# Altium PCB WiFi_board.PcbDoc
Units mm, origin at the board's own origin, x right, y up, seen from the top; angles counter-clockwise.
Board outline 43.69 x 34.29 mm, 2 copper layers (Top Layer, Bottom Layer); 13 components, 21 nets, 107 pads, 13 vias.
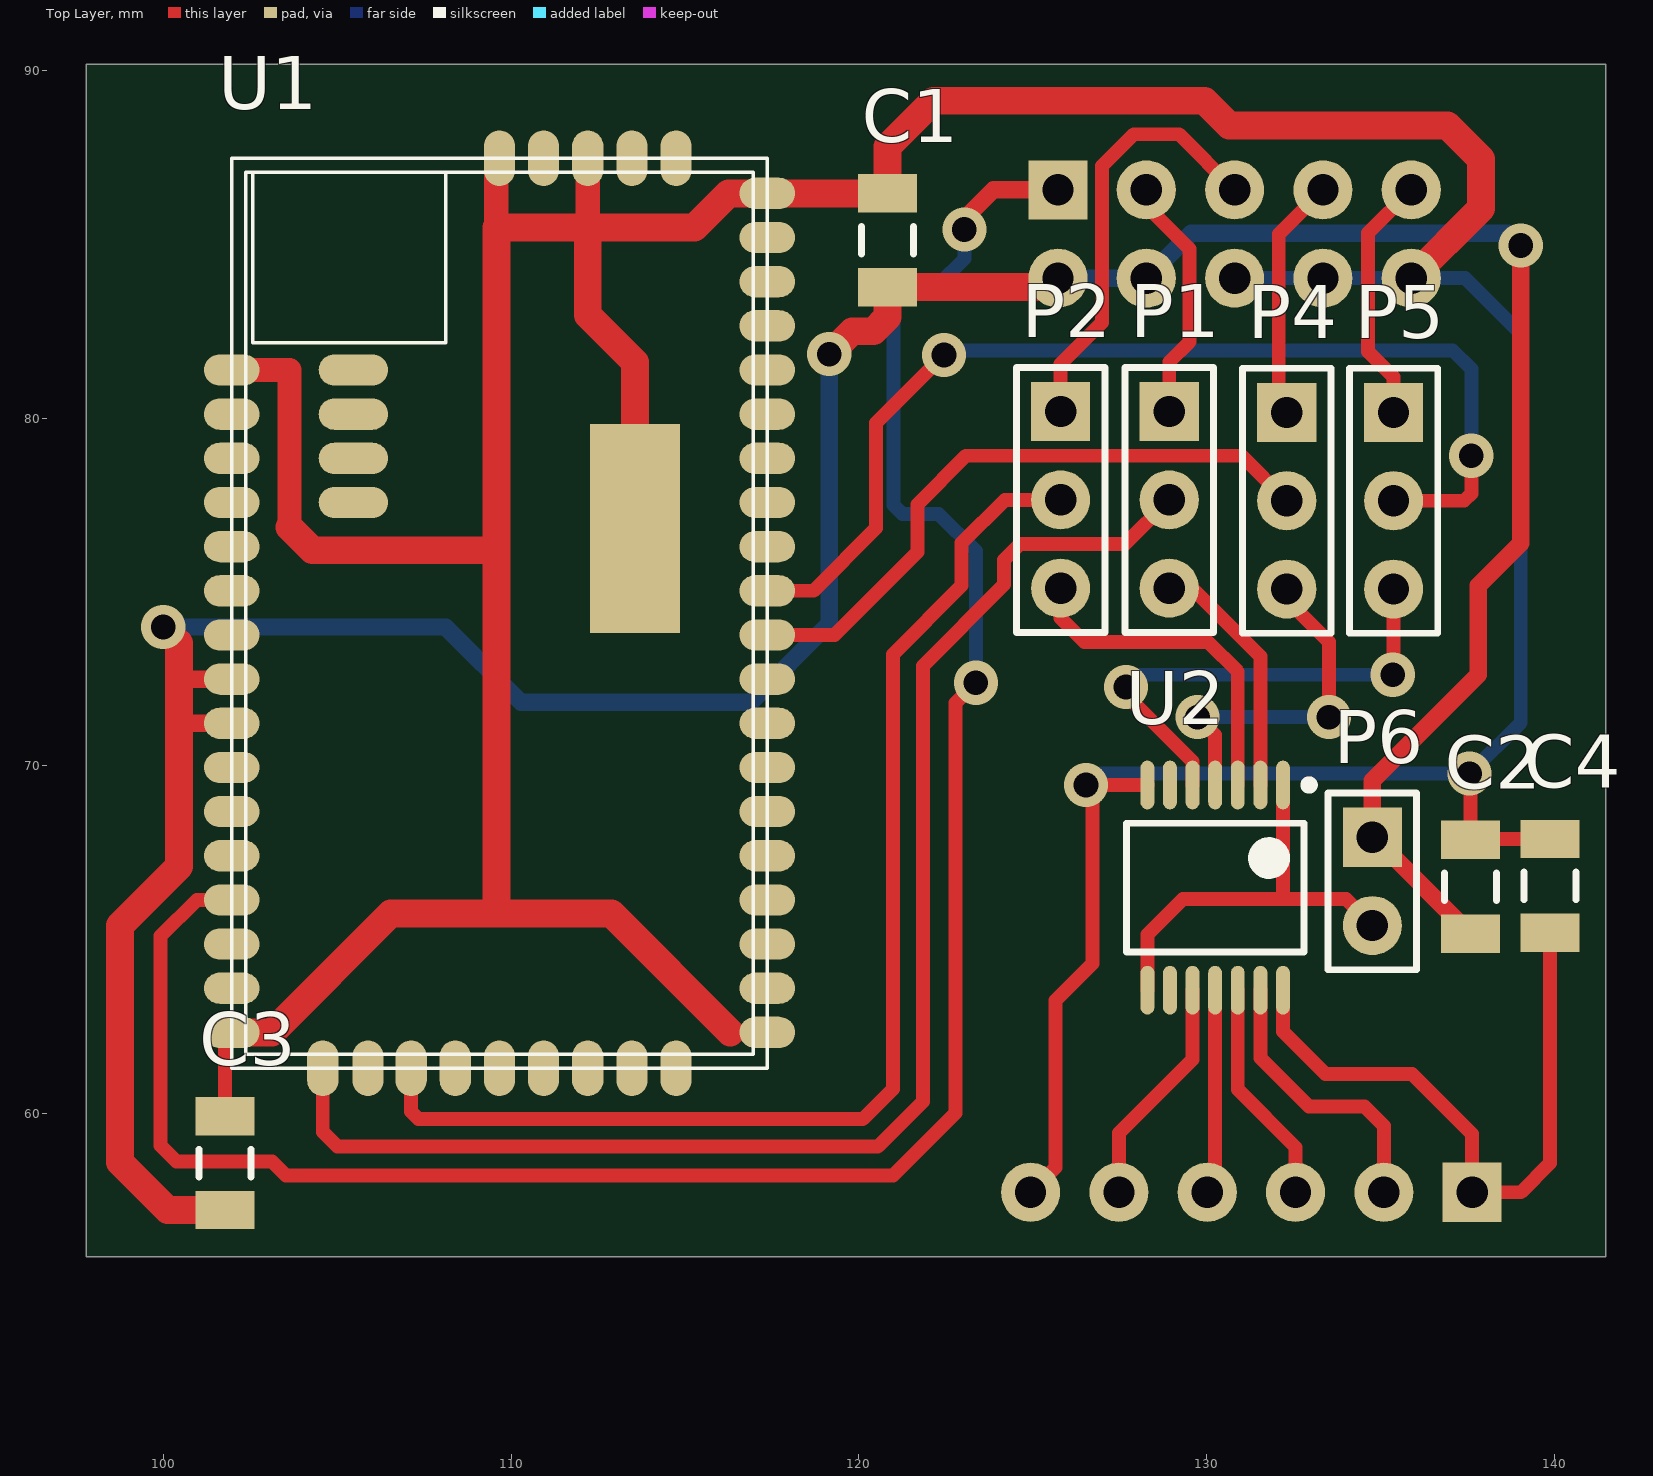
[diagram p0: Top Layer view]
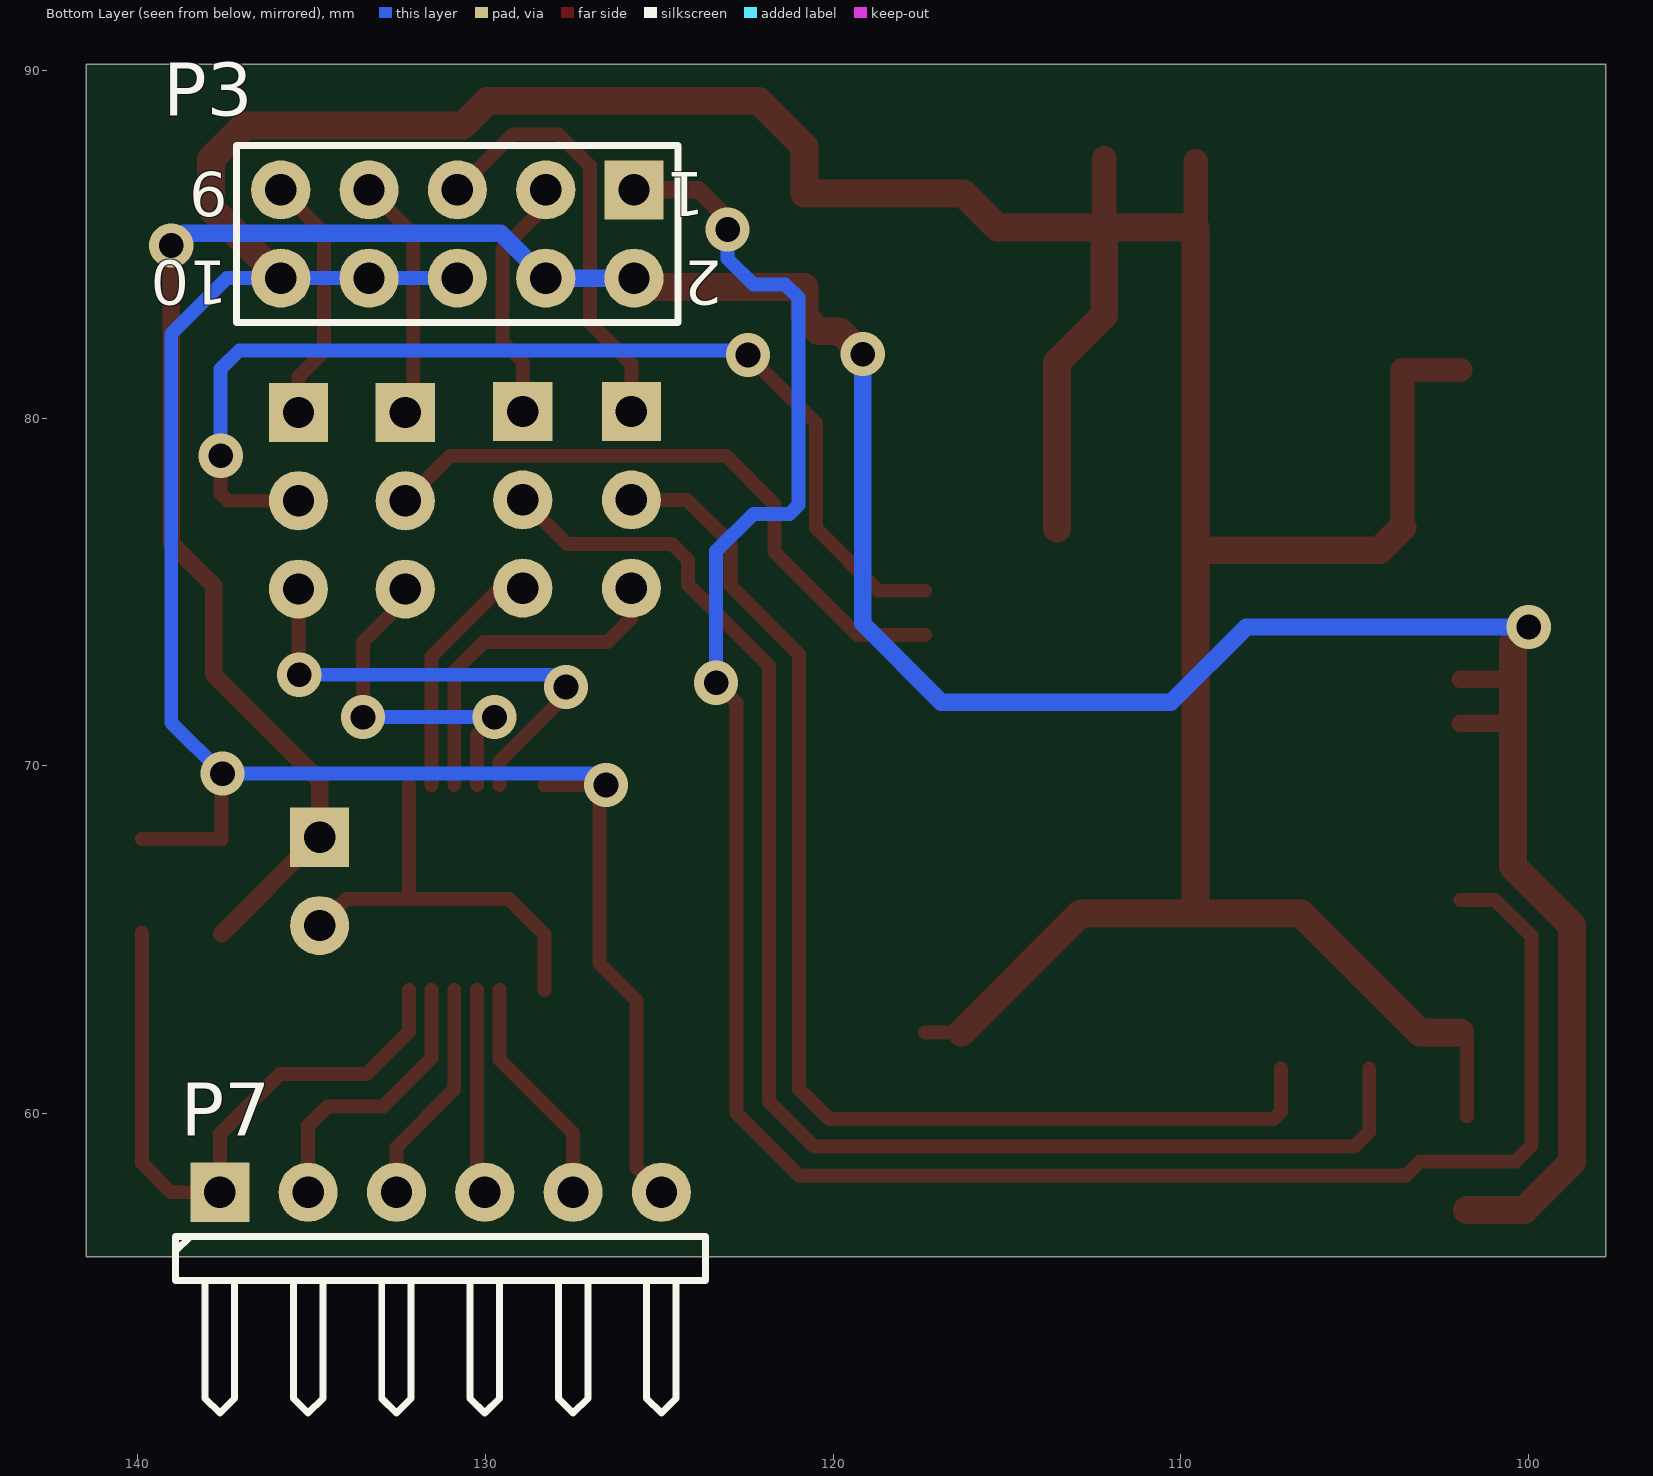
[diagram p1: Bottom Layer view, seen from below]

## Layer stack, top to bottom
Top Solder: solder mask 0.0102, Solder Resist, Dk 3.5
Top Layer: signal copper 0.0356
Dielectric 1: dielectric 0.32, FR-4, Dk 4.8
Bottom Layer: signal copper 0.0356
Bottom Solder: solder mask 0.0102, Solder Resist, Dk 3.5

## Board outline
97.79,55.88 97.79,90.17 141.478,90.17 141.478,55.88

## Design rules (kind name [scope] priority, off if disabled: settings)
Clearance [All] p1: gap=0
PolygonConnect [All] p1: connectstyle=Relief reliefconductorwidth=0.254 reliefentries=4 polygonreliefangle="90 Angle" airgapwidth=0.254
RoutingVias [All] p1: holewidth=0.711 width=1.27 viastyle="Through Hole" minholewidth=0.711 minwidth=1.27 maxholewidth=0.711 maxwidth=1.27
SolderMaskExpansion [All] p1: expansion=0.102
Width [All] p1: maxlimit=10 minlimit=0.254 preferedwidth=0.254
30 further rules are at their usual default settings.

## Components (designator, comment, footprint, x,y, rotation, side; value= is the part's Value field where it differs from the comment)
C1 "C1" C1206 120.828,85.115 r270 top
C2 "C2" C1206 137.592,66.523 r270 top
C3 "Cap Semi" C1206 101.778,58.572 r270 top
C4 "Cap Semi" C1206 139.878,66.548 r270 top
P1 "Header 3" HDR1X3 128.93,80.188 r270 top
P2 "Header 3" HDR1X3 125.806,80.188 r270 top
P3 "Header 5X2" HDR2X5 125.73,86.563 r0 bottom
P4 "Header 3" HDR1X3 132.309,80.162 r270 top
P5 "Header 3" HDR1X3 135.382,80.162 r270 top
P6 "Header 2" HDR1X2 134.772,67.945 r270 top
P7 "Header 6H" HDR1X6H 137.643,57.734 r180 bottom
U1 "WF121" WF121 109.855,74.549 r0 top
U2 "TXB0104" TSSOP65P640X120-14N 130.251,66.497 r270 top

## Footprints (in the part's own frame and the unit in brackets; to place one, negate y for a bottom-side part, rotate by r counter-clockwise, add the part's x,y. Pads: shape width x height; smd on the part's side, far side on the other; paste and mask are expansions set on the pad)
C1206 [mm] "Chip Capacitor, Body 3.2x1.6mm, IPC High Density"
  rect 1.1x1.7 smd: 1(-1.35,0) 2(1.35,0)
  silkscreen extent -0.4,-0.75 0.4,0.75, body extent -1.7,-0.9 1.7,0.9, height 1.3
HDR1X2 [mm] "Connector; Header; 2 Position"
  rect 1.7x1.7 hole 0.9: 1(0,0)
  round 1.7 hole 0.9: 2(2.54,0)
  silkscreen extent -1.27,-1.27 3.81,1.27
HDR1X3 [mm] "Connector; Header; 3 Position"
  rect 1.7x1.7 hole 0.9: 1(0,0)
  round 1.7 hole 0.9: 2(2.54,0) 3(5.08,0)
  silkscreen extent -1.27,-1.27 6.35,1.27
HDR1X6H [mm] "Connector; Header; 6 Position; Right Angle"
  rect 1.7x1.7 hole 0.9: 1(0,0)
  round 1.7 hole 0.9: 2(2.54,0) 3(5.08,0) 4(7.62,0) 5(10.16,0) 6(12.7,0)
  silkscreen extent -1.27,-6.35 13.97,-1.27
HDR2X5 [mm] "Connector; Header; 5x2 Position"
  rect 1.7x1.7 hole 0.9: 1(0,0)
  round 1.7 hole 0.9: 2(0,2.54) 3(2.54,0) 4(2.54,2.54) 5(5.08,0) 6(5.08,2.54) 7(7.62,0) 8(7.62,2.54) 9(10.16,0) 10(10.16,2.54)
  silkscreen extent -1.27,-1.27 11.43,3.81
TSSOP65P640X120-14N [mm] "TSSOP, 14-Leads, Body 5.00x4.40mm, Pitch 0.65mm, IPC Medium Density"
  oval 1.4x0.4 smd: 1(-2.95,1.95) 2(-2.95,1.3) 3(-2.95,0.65) 4(-2.95,0) 5(-2.95,-0.65) 6(-2.95,-1.3) 7(-2.95,-1.95) 8(2.95,-1.95) 9(2.95,-1.3) 10(2.95,-0.65) 11(2.95,0) 12(2.95,0.65) 13(2.95,1.3) 14(2.95,1.95)
  silkscreen extent -3.07,-2.55 1.85,2.83, body extent -2.25,-2.55 2.25,2.55, height 1.2
WF121 [mm]
  oval 1.6x0.9 smd mask+0.05: 1(-7.888,6.834) 2(-7.888,5.564) 3(-7.888,4.294) 4(-7.888,3.024) 5(-7.888,1.754) 6(-7.888,0.484) 7(-7.888,-0.786) 8(-7.888,-2.056) 9(-7.888,-3.326) 10(-7.888,-4.596) 11(-7.888,-5.866) 12(-7.888,-7.136) 13(-7.888,-8.406) 14(-7.888,-9.676) 15(-7.888,-10.946) 16(-7.888,-12.216) 26(7.512,-12.216) 27(7.512,-10.946) 28(7.512,-9.676) 29(7.512,-8.406) 30(7.512,-7.136) 31(7.512,-5.866) 32(7.512,-4.596) 33(7.512,-3.326) 34(7.512,-2.056) 35(7.512,-0.786) 36(7.512,0.484) 37(7.512,1.754) 38(7.512,3.024) 39(7.512,4.294) 40(7.512,5.564) 41(7.512,6.834) 42(7.512,8.104) 43(7.512,9.374) 44(7.512,10.644) 45(7.512,11.914)
  oval 0.9x1.6 smd mask+0.05: 17(-5.268,-13.251) 18(-3.968,-13.251) 19(-2.728,-13.251) 20(-1.458,-13.251) 21(-0.188,-13.251) 22(1.082,-13.251) 23(2.352,-13.251) 24(3.622,-13.251) 25(4.892,-13.251) 46(4.892,12.924) 47(3.622,12.924) 48(2.352,12.924) 49(1.082,12.924) 50(-0.188,12.924)
  rect 2.6x6 smd mask+0.05: 51(3.712,2.274)
  oval 2x0.9 smd mask+0.05: 52(-4.388,6.834) 53(-4.388,5.564) 54(-4.388,4.294) 55(-4.388,3.024)
  silkscreen extent -7.89,-13.25 7.51,12.92

## Part data
C1 C2: library part "Cap Semi", "Capacitor (Semiconductor SIM Model)"
C3 C4: "Capacitor (Semiconductor SIM Model)"
P1 P2 P4 P5: "Header, 3-Pin"
P3: "Header, 5-Pin, Dual row"
P6: "Header, 2-Pin"
P7: "Header, 6-Pin, Right Angle"

## Via types
v1: diameter 1.27, hole 0.711, Top Layer to Bottom Layer, 13 vias

## Nets (pads, with @x,y where several pads share a name; then routed paths per layer and width w, separated by ;. In a path a pad name is that pad's centre, name@x,y a point inside that pad or via, vN(x,y) a via of type N, cw(c..) or ccw(c..) an arc to the next point about the centre after c; other vN are vias at no path point)
3.3V: C1.2 C2.2 C3.2 P3.2 P3.4 P6.1 U1.8 U1.9 | length 96.3
  Top Layer w0.5: v1(100,73.99) 100.456,73.534 ; 100.456,71.274 100.506,71.223 U1.9 ; 100.456,72.493 U1.8 ; P3.2@125.472,83.765 P3.2 ; C2.2 134.819,67.945 P6.1 134.772,69.571 137.82,72.619 137.82,75.184 139.04,76.403 v1@139.04,84.887
  Top Layer w0.8: 100.456,73.534 100.456,72.493 100.456,71.274 100.456,67.105 98.755,65.405 98.755,58.598 100.131,57.222 C3.2 ; v1(119.151,81.839) 119.812,82.499 120.421,82.499 120.828,82.906 C1.2 P3.2@125.472,83.765
  Bottom Layer w0.5: v1(100,73.99) 108.128,73.99 110.287,71.831 116.891,71.831 119.151,74.092 v1(119.151,81.839) v1@119.177,81.864 ; P3.2 P3.4 129.565,85.319 138.684,85.319 v1(139.04,84.963)
5V: C4.2 P7.1 U2.14 | length 18.7
  Top Layer w0.4: U2.14 132.201,62.363 133.426,61.138 135.915,61.138 137.643,59.411 P7.1 139.04,57.734 139.878,58.572 C4.2
CTS: P1.2 U1.17 | length 41.8
  Top Layer w0.4: U1.17 104.587,59.472 105.004,59.055 120.548,59.055 121.844,60.35 121.844,72.873 124.181,75.209 124.181,75.921 124.638,76.378 127.66,76.378 P1.2
GND: C1.1 C2.1 C3.1 C4.1 P3.6 P3.8 P3.10 P7.6 U1.1 U1.16 U1.26 U1.45 U1.48 U1.50 U1.51 U2.7 | length 153
  Top Layer w0.4: C3.1 U1.16@101.778,62.144 ; 109.576,85.471 109.586,85.481 ; U1.50@109.576,87.382 U1.50 ; 116.305,62.333 U1.26 ; P7.6 125.654,58.445 125.654,63.246 126.721,64.313 126.721,69.447 U2.7 ; v1(137.566,69.774) 137.592,69.748 C2.1 137.617,67.898 C4.1
  Top Layer w0.7: U1.1 103.631,81.383 103.631,76.862 ; 109.576,85.471 U1.50@109.576,87.382 ; 112.207,85.481 U1.48
  Top Layer w0.8: U1.16 103.125,62.333 106.543,65.75 109.586,65.75 ; 103.631,76.862 104.292,76.2 109.586,76.2 ; U1.51 113.567,81.607 112.207,82.967 112.207,85.481 ; 116.305,62.333 112.888,65.75 109.586,65.75 ; P3.10 137.897,86.03 137.897,87.452 136.931,88.417 130.658,88.417 129.946,89.129 122.149,89.129 120.825,87.805 120.825,86.463 U1.45 116.257,86.463 115.275,85.481 112.207,85.481 ; 109.586,65.75 109.586,76.2 ; 109.586,76.2 109.586,85.481 112.207,85.481
  Bottom Layer w0.4: v1(126.539,69.447) 126.866,69.774 v1(137.566,69.774) 139.04,71.247 139.04,82.423 137.439,84.023 P3.10 P3.8 P3.6
NetP1_1: P1.1 P3.3 | length 7.1
  Top Layer w0.4: P3.3 128.27,86.106 129.515,84.861 129.515,82.194 128.93,81.61 P1.1
NetP1_3: P1.3 U2.2 | length 7.1
  Top Layer w0.4: P1.3 129.591,75.108 131.551,73.147 U2.2
NetP2_1: P2.1 P3.5 | length 12.4
  Top Layer w0.4: P2.1 125.806,81.559 127,82.753 127,87.249 127.914,88.163 129.21,88.163 P3.5
NetP2_3: P2.3 U2.3 | length 9.9
  Top Layer w0.4: P2.3 125.806,74.244 126.492,73.558 130.048,73.558 130.901,72.705 U2.3
NetP3_7: P3.7 P4.1 | length 7
  Top Layer w0.4: P4.1 132.08,80.391 132.08,85.293 P3.7
NetP3_9: P3.9 P5.1 | length 7.2
  Top Layer w0.4: P5.1 135.382,81.178 134.645,81.915 134.645,85.319 P3.9
NetP4_3: P4.3 U2.4 | length 10.1
  Top Layer w0.4: v1(129.743,71.399) 130.251,70.891 U2.4 ; P4.3 132.309,74.778 133.528,73.558 v1(133.528,71.399)
  Bottom Layer w0.4: v1(129.743,71.399) v1(133.528,71.399)
NetP5_3: P5.3 U2.5 | length 13.9
  Top Layer w0.4: v1(127.686,72.263) 127.686,72.034 129.601,70.119 U2.5 ; v1@135.382,72.619 P5.3
  Bottom Layer w0.4: v1(127.686,72.263) 128.041,72.619 v1(135.357,72.619)
NetP6_2: P6.2 U2.1 U2.8 | length 12.1
  Top Layer w0.4: U2.8 128.301,65.145 129.323,66.167 134.01,66.167 P6.2 ; 132.201,66.187 U2.1
NetP7_2: P7.2 U2.13 | length 8.2
  Top Layer w0.4: U2.13 131.551,61.59 132.944,60.198 134.544,60.198 135.103,59.639 P7.2
NetP7_3: P7.3 U2.12 | length 6.5
  Top Layer w0.4: U2.12 130.901,60.691 132.563,59.03 P7.3
NetP7_4: P7.4 U2.11 | length 5.9
  Top Layer w0.4: P7.4 130.251,57.963 U2.11
NetP7_5: P7.5 U2.10 | length 6.7
  Top Layer w0.4: P7.5 127.483,59.436 129.601,61.555 U2.10
RESET: P3.1 U1.13 | length 64.4
  Top Layer w0.4: U1.13 100.966,66.143 99.924,65.1 99.924,59.08 100.381,58.623 103.124,58.623 103.53,58.217 120.98,58.217 122.784,60.02 122.784,71.806 v1(123.368,72.39)
  Top Layer w0.5: v1(123.038,85.42) 123.038,85.725 123.876,86.563 P3.1
  Bottom Layer w0.4: v1(123.038,85.42) 123.038,84.582 122.301,83.845 121.387,83.845 121.006,83.464 121.006,77.495 121.26,77.241 122.301,77.241 123.368,76.175 v1(123.368,72.39)
RTS: P2.2 U1.19 | length 35.4
  Top Layer w0.4: U1.19 107.127,60.056 107.34,59.842 120.117,59.842 120.98,60.706 120.98,73.203 122.961,75.184 122.961,76.403 124.206,77.648 P2.2
RX: P4.2 U1.35 | length 18.4
  Top Layer w0.4: U1.35 119.305,73.763 121.691,76.149 121.691,77.521 123.088,78.918 131.013,78.918 P4.2
TX: P5.2 U1.36 | length 31
  Top Layer w0.4: U1.36 118.696,75.033 120.498,76.835 120.498,79.858 v1(122.453,81.813) ; P5.2 137.414,77.622 137.617,77.826 v1(137.617,78.918)
  Bottom Layer w0.4: v1(122.453,81.813) 122.58,81.94 137.084,81.94 137.617,81.407 v1(137.617,78.918) v1@137.643,78.943
pads on no net: U1.2 U1.3 U1.4 U1.5 U1.6 U1.7 U1.10 U1.11 U1.12 U1.14 U1.15 U1.18 U1.20 U1.21 U1.22 U1.23 U1.24 U1.25 U1.27 U1.28 U1.29 U1.30 U1.31 U1.32 U1.33 U1.34 U1.37 U1.38 U1.39 U1.40 U1.41 U1.42 U1.43 U1.44 U1.46 U1.47 U1.49 U1.52 U1.53 U1.54 U1.55 U2.6 U2.9

## Text inside footprints (layer, text, board x,y; h text height)
P3: Bottom Overlay "2" at 123.19,84.531 h1.27 r180; Bottom Overlay "1" at 123.698,87.071 h1.27 r180; Bottom Overlay "9" at 137.414,87.071 h1.27 r180; Bottom Overlay "10" at 137.414,84.531 h1.27 r180